# Altium PCB PCB3.PcbDoc
Units mil, origin at the board's own origin, x right, y up, seen from the top; angles counter-clockwise.
Board outline 3937.01 x 3937.01 mil, 2 copper layers (Top Layer, Bottom Layer); 71 components, 48 nets, 176 pads, 328 vias.
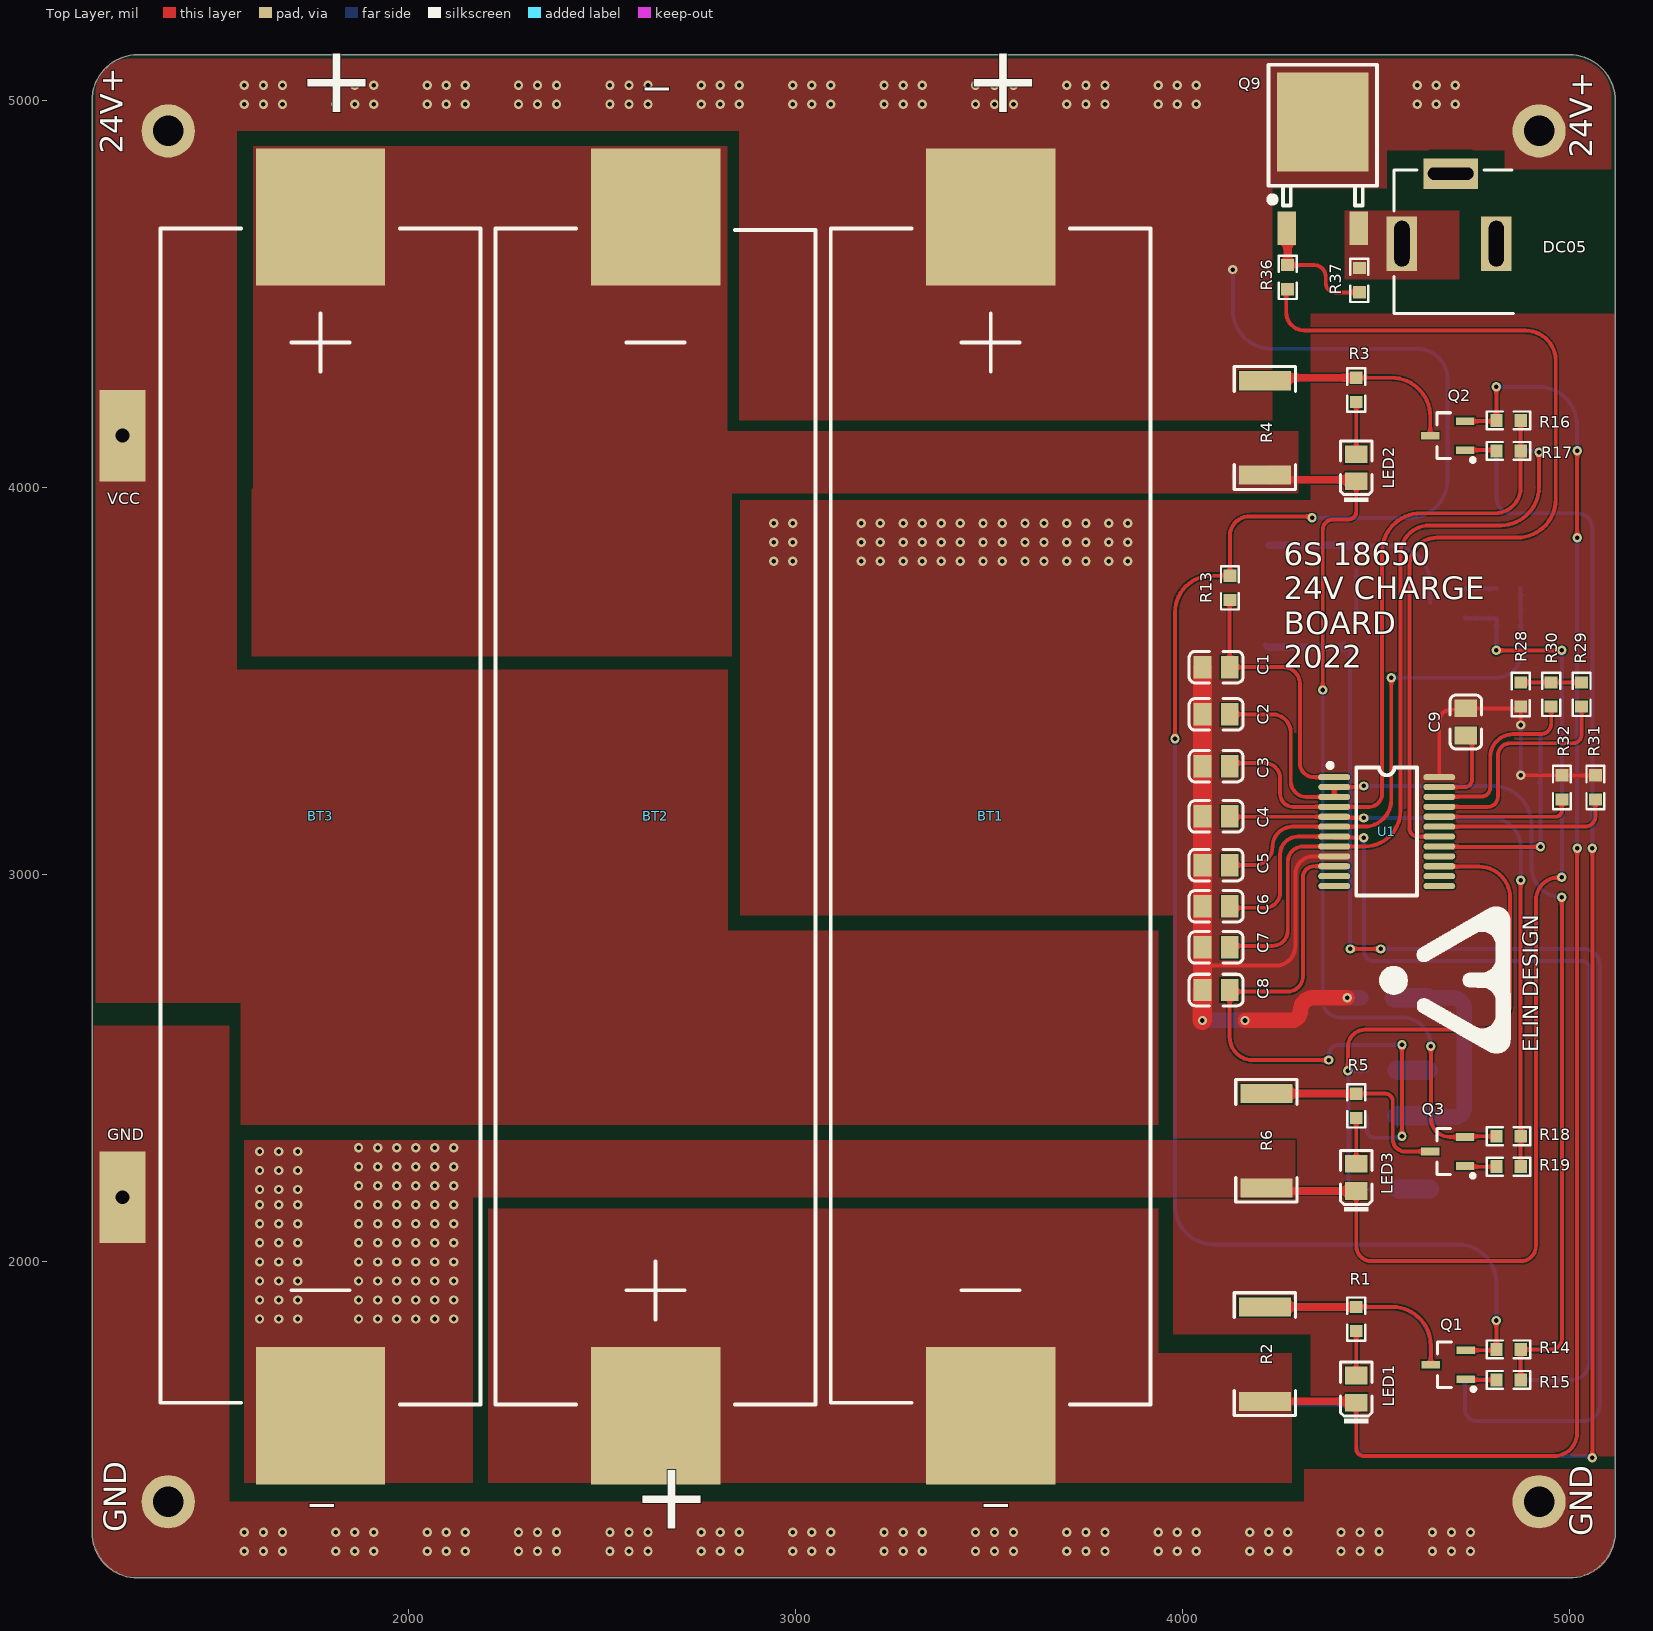
[diagram p0: Top Layer view]
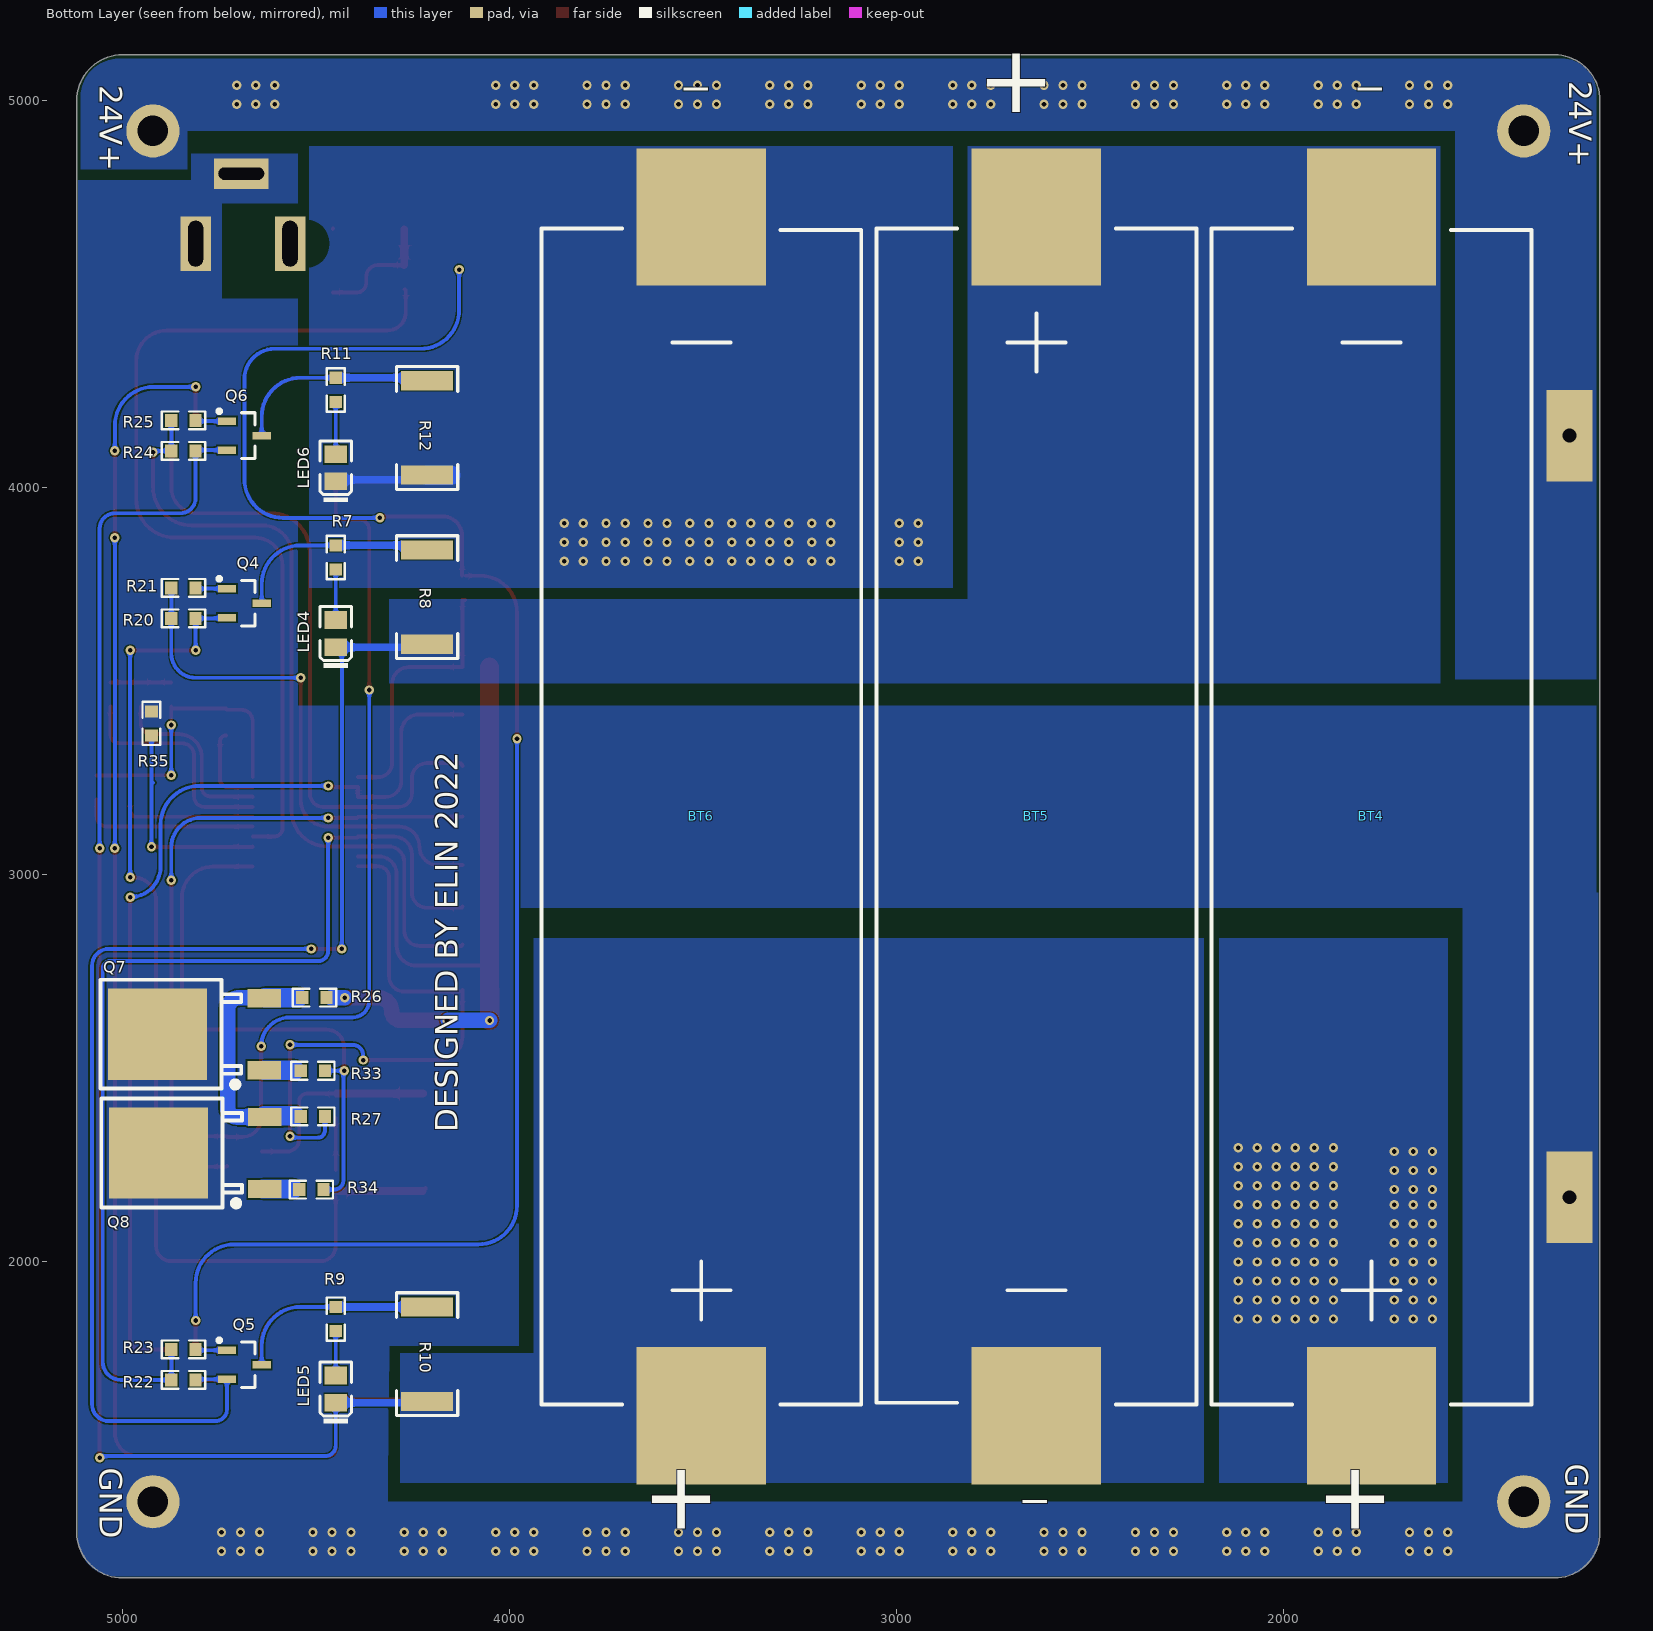
[diagram p1: Bottom Layer view, seen from below]
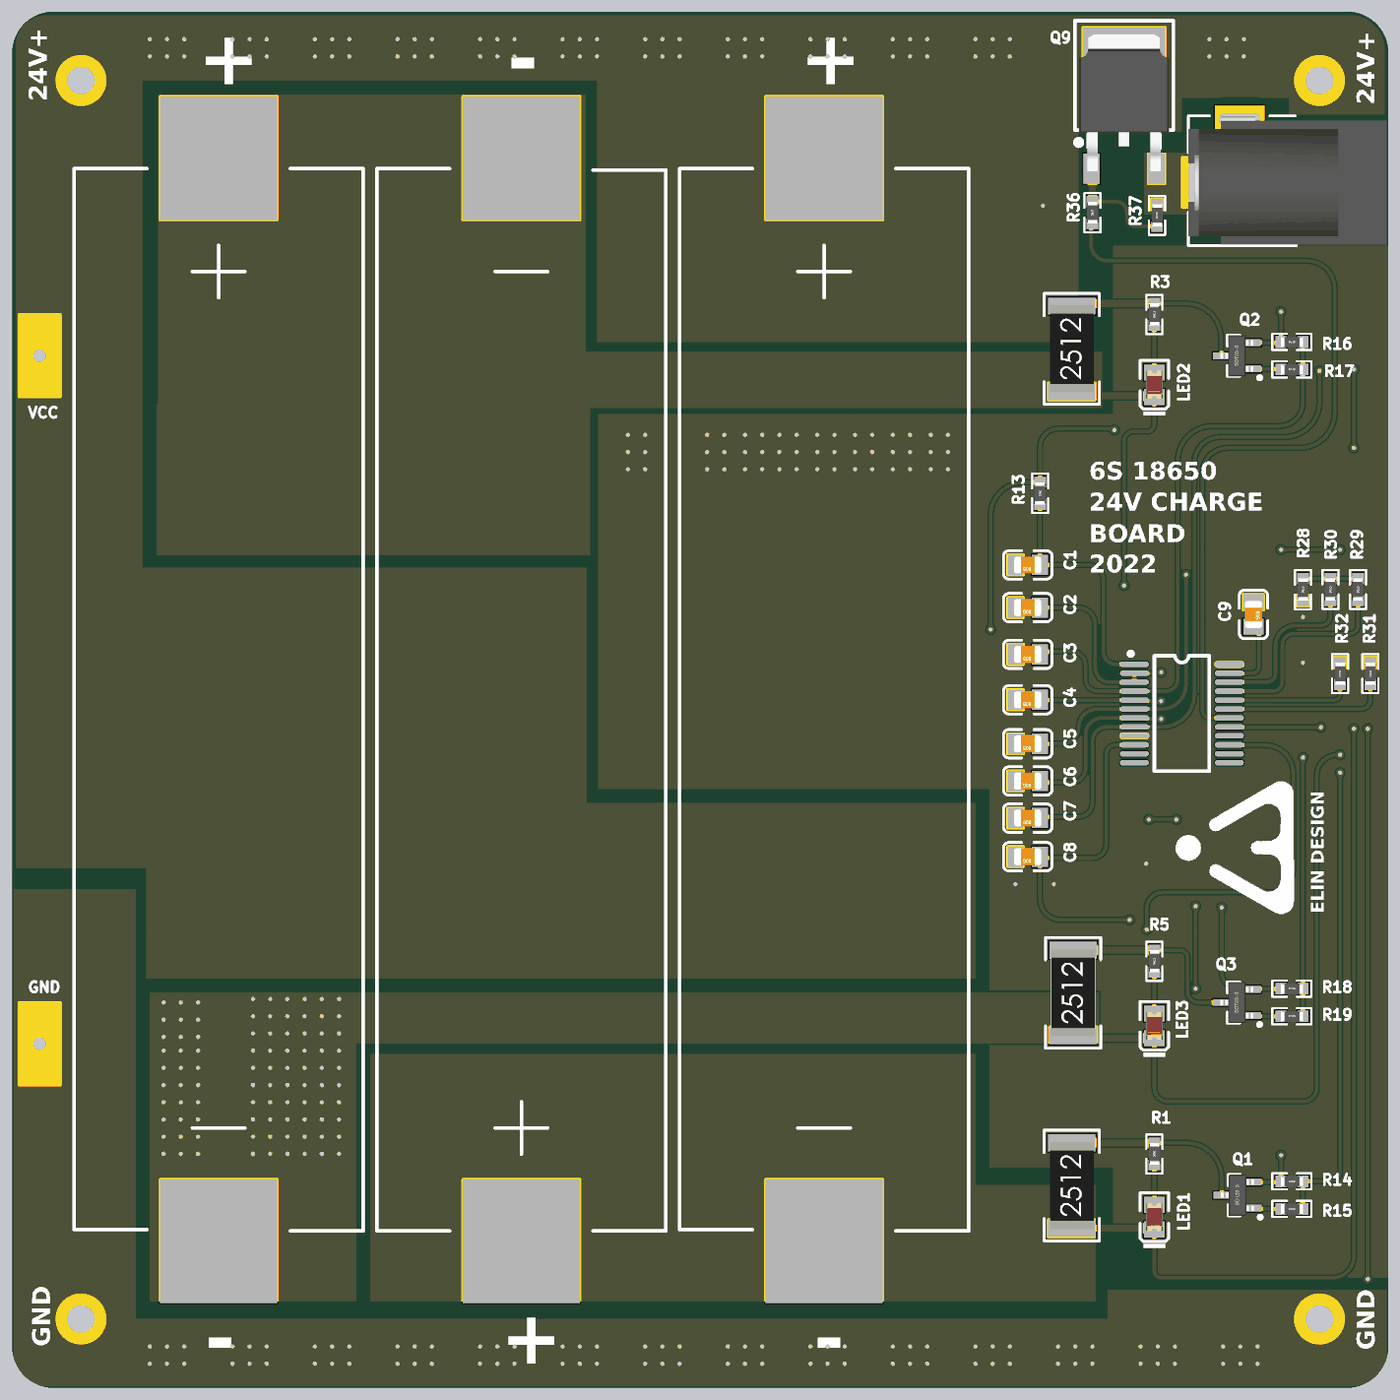
[diagram p2: 3D render of the assembled board from above, using the file's embedded part models]
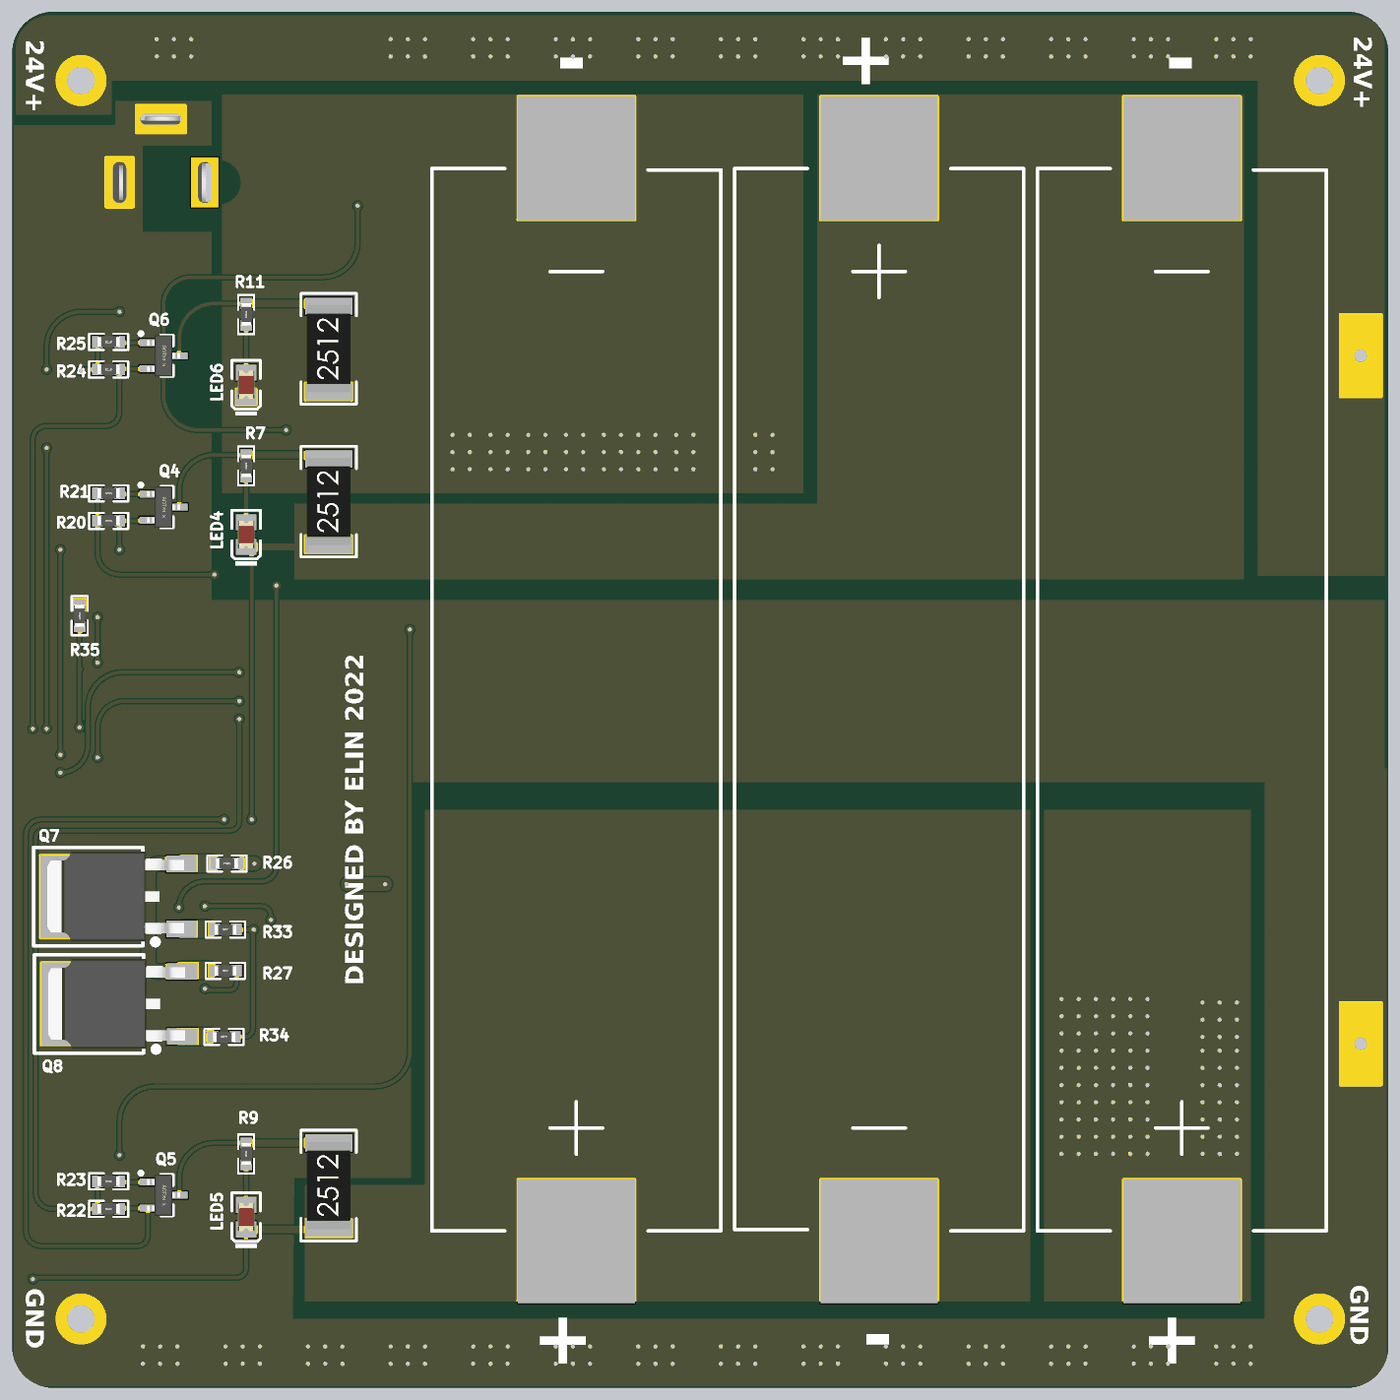
[diagram p3: 3D render of the assembled board from below, using the file's embedded part models]

## Layer stack, top to bottom
Top Solder: solder mask 0.4, Solder Resist, Dk 3.5
Top Layer: signal copper 1.4
Dielectric 1: dielectric 12.6, FR-4, Dk 4.8
Bottom Layer: signal copper 1.4
Bottom Solder: solder mask 0.4, Solder Resist, Dk 3.5

## Board outline
1181.1,1299.21 1181.1,5000 cw(c1299.21,5000) 1299.21,5118.11 5000,5118.11 cw(c5000,5000) 5118.11,5000 5118.11,1299.21 cw(c5000,1299.21) 5000,1181.1 1299.21,1181.1 cw(c1299.21,1299.21)

## Design rules (kind name [scope] priority, off if disabled: settings)
Clearance [All] p1: gap=4 ignorepadtopadclearanceinfootprint=FALSE
HoleSize [All] p1: absolutevalues=TRUE maxlimit=400 minlimit=1 maxpercent=80.000 minpercent=20.000
HoleToHoleClearance [All] p1: gap=3 allowstackedmicrovias=TRUE
MinimumSolderMaskSliver [All] p1: minsoldermaskwidth=3
PlaneConnect [All] p1: planeconnectstyle=Direct reliefexpansion=20 reliefentries=4 reliefconductorwidth=10 reliefairgap=10
PolygonConnect [All] p1: connectstyle=Direct reliefconductorwidth=10 reliefentries=4 polygonreliefangle="90 Angle" airgapwidth=10
RoutingVias [All] p1: holewidth=12 width=24 viastyle="Through Hole" minholewidth=10 minwidth=20 maxholewidth=28 maxwidth=50
SilkToSilkClearance [All] p1: silktosilkclearance=3
SilkToSolderMaskClearance [IsPad] p1: minsilkscreentomaskgap=3 clearancetoexposedcopper=TRUE
SolderMaskExpansion [All] p1: expansion=4
Width [All] p1: maxlimit=196.85 minlimit=10 preferedwidth=10
24 further rules are at their usual default settings.

## Components (designator, comment, footprint, x,y, rotation, side; value= is the part's Value field where it differs from the comment)
BT1 "18650" 18650-贴片 3503.94,3149.61 r270 top locked
BT2 "18650" 18650-贴片 2637.8,3149.61 r90 top locked
BT3 "18650" 18650-贴片 1771.65,3149.61 r270 top locked
BT4 "18650" 18650-贴片 1771.65,3149.61 r90 bottom locked
BT5 "18650" 18650-贴片 2637.8,3149.61 r270 bottom locked
BT6 "18650" 18650-贴片 3503.94,3149.61 r90 bottom locked
C1 "" 0805_C 4086.61,3535.43 r180 top value=100nF
C2 "" 0805_C 4086.61,3413.39 r180 top value=100nF
C3 "" 0805_C 4086.61,3279.53 r180 top value=100nF
C4 "" 0805_C 4086.61,3149.61 r180 top value=100nF
C5 "" 0805_C 4086.61,3023.62 r180 top value=100nF
C6 "" 0805_C 4086.61,2917.32 r180 top value=100nF
C7 "" 0805_C 4086.61,2811.02 r180 top value=100nF
C8 "" 0805_C 4086.61,2700.79 r180 top value=100nF
C9 "" 0805_C 4732.28,3393.7 r270 top value=100nF
DC05 "DC05" "DC-005 - duplicate" 5106.3,4629.92 r180 top
GND "pad" PAD3*3#1 1259.84,2480.32 r90 top (schematic designator pad2)
LED1 "G" LED_0805 4448.82,1669.29 r270 top
LED2 "G" LED_0805 4448.82,4050.79 r270 top
LED3 "G" LED_0805 4448.82,2216.54 r270 top
LED4 "G" LED_0805 4448.82,3622.05 r270 bottom
LED5 "G" LED_0805 4448.82,1669.29 r270 bottom
LED6 "G" LED_0805 4448.82,4050.79 r270 bottom
Q1 "8550" SOT23 4686.73,1732.28 r180 top
Q2 "8550" SOT23 4685.04,4133.86 r180 top
Q3 "8550" SOT23 4685.04,2283.46 r180 top
Q4 "8550" SOT23 4685.04,3700.79 r180 bottom
Q5 "8550" SOT23 4685.04,1732.28 r180 bottom
Q6 "8550" SOT23 4685.04,4133.86 r180 bottom
Q7 "NCE3080K" LC-TO-252-2 4633.86,2586.61 r180 bottom
Q8 "NCE3080K" LC-TO-252-2 4631.73,2279.53 r180 bottom
Q9 "AOD403" LC-TO-252-2 4362.21,4669.29 r270 top
R1 "" 0603-R 4448.82,1850.39 r90 top value=1K
R2 "" LC-2512_R 4212.6,1759.84 r90 top value=50
R3 "" 0603-R 4448.82,4251.97 r90 top value=1K
R4 "" LC-2512_R 4212.6,4153.54 r90 top value=50
R5 "" 0603-R 4448.82,2401.57 r90 top value=1K
R6 "" LC-2512_R 4216.54,2311.02 r90 top value=50
R7 "" 0603-R 4448.82,3818.9 r90 bottom value=1K
R8 "" LC-2512_R 4212.6,3716.54 r90 bottom value=50
R9 "" 0603-R 4448.82,1850.39 r90 bottom value=1K
R10 "" LC-2512_R 4212.6,1759.84 r90 bottom value=50
R11 "" 0603-R 4448.82,4251.97 r90 bottom value=1K
R12 "" LC-2512_R 4212.6,4153.54 r90 bottom value=50
R13 "" 0603-R 4122.05,3740.16 r270 top value=1K
R14 "" 0603-R 4842.52,1771.65 r0 top value=1K
R15 "" 0603-R 4842.52,1692.91 r0 top value=1K
R16 "" 0603-R 4842.52,4173.23 r0 top value=1K
R17 "" 0603-R 4842.52,4094.49 r0 top value=1K
R18 "" 0603-R 4842.52,2322.83 r0 top value=1K
R19 "" 0603-R 4842.52,2244.09 r0 top value=1K
R20 "" 0603-R 4842.52,3661.42 r0 bottom value=1K
R21 "" 0603-R 4842.52,3740.16 r0 bottom value=1K
R22 "" 0603-R 4842.52,1692.91 r0 bottom value=1K
R23 "" 0603-R 4842.52,1771.65 r0 bottom value=1K
R24 "" 0603-R 4842.52,4094.49 r0 bottom value=1K
R25 "" 0603-R 4842.52,4173.23 r0 bottom value=1K
R26 "" 0603-R 4503.94,2681.1 r0 bottom value=1K
R27 "" 0603-R 4507.87,2374.02 r180 bottom value=1K
R28 "QN0603X103J3435HB" 0603-R 4874.02,3464.78 r90 top
R29 "" 0603-R 5031.5,3464.78 r270 top value=350K
R30 "" 0603-R 4952.76,3464.78 r270 top value=35K
R31 "" 0603-R 5066.93,3224.41 r90 top value=1K
R32 "" 0603-R 4980.31,3224.41 r90 top value=1K
R33 "" 0603-R 4507.87,2492.13 r180 bottom value=1K
R34 "" 0603-R 4511.81,2185.04 r180 bottom value=1K
R35 "" 0603-R 4925.2,3389.76 r270 bottom value=200K
R36 "" 0603-R 4271.65,4543.31 r90 top value=2M
R37 "" 0603-R 4456.69,4535.43 r90 top value=2M
U1 "CW1073AAAS" LC-SSOP-24_208mil 4527.56,3110.24 r270 top
VCC "pad" PAD3*3#2 1259.84,4133.86 r0 top (schematic designator pad1)

## Footprints (in the part's own frame and the unit in brackets; to place one, negate y for a bottom-side part, rotate by r counter-clockwise, add the part's x,y. Pads: shape width x height; smd on the part's side, far side on the other; paste and mask are expansions set on the pad)
0603-R [mm]
  rect 0.8x0.85 smd: 1(-0.795,0) 2(0.795,0)
  silkscreen extent -1.43,-0.58 1.42,0.58, body extent -0.8,-0.41 0.8,0.39, height 0.4
0805_C [mm]
  rect 1.16x1.47 smd: 1(-0.89,0) 2(0.89,0)
  silkscreen extent -1.77,-1.04 1.77,1.04, body extent -1,-0.63 1,0.63, height 0.77
18650-贴片 [mm]
  rect 9x8.5 smd: 1(-39.35,0) 2(39.35,0)
  silkscreen extent -38.6,-10.5 38.6,10.5
"DC-005 - duplicate" [mm] "DC Power Jack,  5.5*2.1mm, PCB Mount"
  rect 2x3.6 hole 3 slot 1 at 0 deg: 1(13.7,0) 2(7.5,0)
  rect 3.6x2 hole 3 slot 0.8 at 90 deg: 3(10.5,-4.6)
  silkscreen extent 6.38,-4.83 14.22,4.6, body extent -0.18,-4.78 14.22,4.52, height 11
LC-2512_R [mm]
  rect 1.25x3.42 smd: 1(-3.1,0) 2(3.1,0)
  silkscreen extent -4.03,-2.01 4.02,2.01, body extent -3.16,-1.6 3.16,1.6, height 0.62
LC-SSOP-24_208mil [mm]
  oval 0.4x2.1 smd mask+0.051: 1(-3.575,-3.45) 2(-2.925,-3.45) 3(-2.275,-3.45) 4(-1.625,-3.45) 5(-0.975,-3.45) 6(-0.325,-3.45) 7(0.325,-3.45) 8(0.975,-3.45) 9(1.625,-3.45) 10(2.275,-3.45) 11(2.925,-3.45) 12(3.575,-3.45) 13(3.575,3.45) 14(2.925,3.45) 15(2.275,3.45) 16(1.625,3.45) 17(0.975,3.45) 18(0.325,3.45) 19(-0.325,3.45) 20(-0.975,3.45) 21(-1.625,3.45) 22(-2.275,3.45) 23(-2.925,3.45) 24(-3.575,3.45)
  silkscreen extent -4.5,-3.86 4.2,2
LC-TO-252-2 [mm]
  rect 2.2x1.2 smd: 1(0,-2.361) 3(-0.004,2.361)
  rect 6.5x6 smd: 2(-7,0)
  silkscreen extent -10.75,-3.57 -1.5,3.57, body extent -9.74,-3.27 0.2,3.27, height 2.44
LED_0805 [mm] "贴片二极管"
  rect 1.16x1.47 smd: 1(-0.89,0) 2(0.89,0)
  silkscreen extent -1.77,-1.03 2.24,1.04, body extent -1.01,-0.62 1.01,0.62, height 1.1
PAD3*3#1 [mm] "3MM*3MM"
  rect 6x3 hole 0.9: 1(-8,0)
PAD3*3#2 [mm] "3MM*3MM"
  rect 3x6 hole 0.9: 1(0,0)
SOT23 [mm] "SOT23, 3-Leads, Body 2.9x1.3mm, Pitch 0.95mm, Lead Span 2.3mm, IPC Medium Density"
  rect 1.2x0.5 smd: 1(-1.143,0.95) 2(-1.143,-0.95) 3(1.143,0)
  silkscreen extent -1.78,-1.5 0.7,1.72, body extent -1.2,-1.5 1.2,1.5, height 1.05

## Part data
BT1 BT2 BT3 BT4 BT5 BT6: library part Battery, "Multicell Battery", LatestRevisionDate=17-Jul-2002, LatestRevisionNote="Re-released for DXP Platform.", PackageDescription="Battery; 2 Leads", PackageReference=BAT-2, Published=24-Mar-1999, Publisher="Altium Limited"
C1 C2 C3 C4 C5 C6 C7 C8 C9: library part Cap, "Capacitor", LatestRevisionDate=17-Jul-2002, LatestRevisionNote="Re-released for DXP Platform.", PackageDescription="Radial Cap, Thru-Hole; 2 Leads; 0.3 in Pin Spacing", PackageReference=RAD-0.3, Published=8-Jun-2000, Publisher="Altium Limited"
DC05: "DC05电源"
GND VCC: library part pad1
LED1 LED2 LED3 LED4 LED5 LED6: BOM_Manufacturer="Everlight Elec", BOM_Manufacturer Part=19-21CUTD/S3484/TR8, BOM_Supplier=LCSC, BOM_Supplier Part=C264445, Contributor=LCSC, spicePre=L, spiceSymbolName=19-21CUTD/S3484/TR8
Q1 Q2 Q3 Q4 Q5 Q6: BOM_Manufacturer="Foshan Blue Rocket Elec", BOM_Manufacturer Part=S8550M-D, BOM_Supplier=LCSC, BOM_Supplier Part=C305484, Contributor=LCSC, spicePre=Q, spiceSymbolName=S8550M-D
Q7 Q8: BOM_JLCPCB SMD=Yes, BOM_Manufacturer=Ncepower, BOM_Manufacturer Part=NCE3080K, BOM_Supplier=LCSC, BOM_Supplier Part=C108901, SMT Type=Extend, spicePre=Q, spiceSymbolName=NCE3080K
Q9: BOM_JLCPCB SMD=Yes, BOM_Manufacturer=AOS, BOM_Manufacturer Part=AOD403, BOM_Supplier=LCSC, BOM_Supplier Part=C28969, image=//image.lceda.cn/szlcsc/C28969.jpg, SMT Type=Extend, spicePre=Q, spiceSymbolName=AOD403
R1 R2 R3 R4 R5 R6 R7 R8 R9 R10 R11 R12 R13 R14 R15 R16 R17 R18 R19 R20 R21 R22 R23 R24 R25 R26 R27 R29 R30 R31 R32 R33 R34 R35 R36 R37: library part Res2, "Resistor", LatestRevisionDate=17-Jul-2002, LatestRevisionNote="Re-released for DXP Platform.", PackageDescription="Axial Device, Thru-Hole; 2 Leads; 0.4 in Pin Spacing", PackageReference=AXIAL-0.4, Published=8-Jun-2000, Publisher="Altium Limited"
R28: BOM_Manufacturer=QAMcn, BOM_Manufacturer Part=QN0603X103J3435HB, BOM_Supplier=LCSC, BOM_Supplier Part=C700828, Contributor=LCSC, spicePre=R, spiceSymbolName=QN0603X103J3435HB
U1: library part Component_1

## Free pads (board coordinates)
  round 137.8 hole 78.74: 3(1377.95,1377.95) 3(1377.95,4921.26) 3(4921.26,1377.95) 3(4921.26,4921.26)

## Via types
v1: diameter 24, hole 12, Top Layer to Bottom Layer, tented both sides, 328 vias

## Nets (pads, with @x,y where several pads share a name; then routed paths per layer and width w, separated by ;. In a path a pad name is that pad's centre, name@x,y a point inside that pad or via, vN(x,y) a via of type N, cw(c..) or ccw(c..) an arc to the next point about the centre after c; other vN are vias at no path point)
CH+: DC05.1 Q9.3 R37.2 | length 2.4
  Top Layer w10: Q9.3 cw(c4455.17,4667.93) Q9.3@4456.69,4667.93
GND: DC05.2 DC05.3 GND.1 pad.3@1377.95,1377.95 pad.3@4921.26,1377.95 Q7.2 Q8.2 R35.1
  other v1: 1574.8,1250 1624.02,1250 1673.23,1250 1811.02,1250 1860.24,1250 1909.45,1250 2047.24,1250 2096.46,1250 2145.67,1250 2283.46,1250 2332.68,1250 2381.89,1250 2519.68,1250 2568.9,1250 2618.11,1250 2755.91,1250 2805.12,1250 2854.33,1250 2992.13,1250 3041.34,1250 3090.55,1250 3228.35,1250 3277.56,1250 3326.77,1250 3464.57,1250 3513.78,1250 3562.99,1250 3700.79,1250 3750,1250 3799.21,1250 3937.01,1250 3986.22,1250 4035.43,1250 4173.23,1250 4222.44,1250 4271.65,1250 4409.45,1250 4458.66,1250 4507.87,1250 4645.67,1250 4694.88,1250 4744.09,1250 1574.8,1299.21 1624.02,1299.21 1673.23,1299.21 1811.02,1299.21 1860.24,1299.21 1909.45,1299.21 2047.24,1299.21 2096.46,1299.21 2145.67,1299.21 2283.46,1299.21 2332.68,1299.21 2381.89,1299.21 2519.68,1299.21 2568.9,1299.21 2618.11,1299.21 2755.91,1299.21 2805.12,1299.21 2854.33,1299.21 2992.13,1299.21 3041.34,1299.21 3090.55,1299.21 3228.35,1299.21 3277.56,1299.21 3326.77,1299.21 3464.57,1299.21 3513.78,1299.21 3562.99,1299.21 3700.79,1299.21 3750,1299.21 3799.21,1299.21 3937.01,1299.21 3986.22,1299.21 4035.43,1299.21 4173.23,1299.21 4222.44,1299.21 4271.65,1299.21 4409.45,1299.21 4458.66,1299.21 4507.87,1299.21 4645.67,1299.21 4694.88,1299.21 4744.09,1299.21
NetBT1_2: BT1.2 BT2.1 LED1.2 Q2.2 R2.1 R16.1 | length 3995.9
  Top Layer w10: LED1.2@4448.82,1618.5 4448.82,1515.75 ccw(c4468.5,1515.75) 4468.5,1496.06 4959.35,1496.06 ccw(c4959.35,1556.4) 5019.69,1556.4 v1(5019.69,3066.93) ; Q2.2 4809.26,4171.26 ccw(c4809.26,4173.23) R16.1 4811.02,4173.23 v1(4811.02,4259.84) ; v1(5019.69,3870.08) v1(5019.69,4094.49)
  Top Layer w20: R2.1 4445.28,1637.8 cw(c4445.28,1634.25) LED1.2
  Bottom Layer w10: v1(4811.02,4259.84) 4919.69,4259.84 cw(c4919.69,4159.84) 5019.69,4159.84 v1(5019.69,4094.49) ; v1(5019.69,3066.93) v1(5019.69,3870.08)
NetBT2_2: BT2.2 BT3.1 LED2.2 Q3.2 R4.1 R18.1 | length 2390.9
  Top Layer w10: R4.1 ccw(c4228.35,4031.5) R4.1@4228.35,4015.75 ; v1(4362.2,3476.38) 4362.2,3889.76 cw(c4389.76,3889.76) 4389.76,3917.32 4429.13,3917.32 ccw(c4429.13,3937.01) 4448.82,3937.01 LED2.2 cw(c4452.76,4015.75) LED2.2@4452.76,4019.68 ; v1(4641.73,2555.12) 4641.73,2370.08 ccw(c4690.94,2370.08) 4690.94,2320.87 Q3.2 cw(c4732.01,2320.87) 4732.01,2322.83 R18.1
  Top Layer w20: R4.1@4232.28,4019.68 LED2.2@4452.76,4019.68
  Bottom Layer w10: v1(4362.2,3476.38) 4362.2,2673.23 ccw(c4405.51,2673.23) 4405.51,2629.92 4566.93,2629.92 cw(c4566.93,2555.12) v1(4641.73,2555.12)
NetBT3_2: BT3.2 BT4.1 LED3.2 Q4.2 R6.1 R20.1 | length 2787.3
  Top Layer w10: R6.1 ccw(c4224.02,2188.98) R6.1@4224.02,2181.5 ; LED3.2@4448.82,2165.35 4448.82,2039.37 ccw(c4488.19,2039.37) 4488.19,2000 4874.02,2000 ccw(c4874.02,2039.37) 4913.39,2039.37 4913.39,2933.07 cw(c4972.44,2933.07) 4972.44,2992.13 v1(4980.31,2992.13) ; v1(4811.02,3578.74) v1(4980.31,3578.74)
  Top Layer w20: R6.1@4224.02,2181.5 LED3.2
  Bottom Layer w10: Q4.2 ccw(c4732.01,3663.39) 4732.01,3661.42 R20.1@4811.02,3661.42 ; v1(4811.02,3578.74) R20.1@4811.02,3661.42 ; R20.1 R20.1@4811.02,3661.42 ; v1(4980.31,2992.13) v1(4980.31,3578.74)
  other v1: 1614.17,1850.39 1663.39,1850.39 1712.6,1850.39 1870.08,1850.39 1919.29,1850.39 1968.5,1850.39 2017.72,1850.39 2066.93,1850.39 2116.14,1850.39 1614.17,1899.61 1663.39,1899.61 1712.6,1899.61 1870.08,1899.61 1919.29,1899.61 1968.5,1899.61 2017.72,1899.61 2066.93,1899.61 2116.14,1899.61 1614.17,1948.82 1663.39,1948.82 1712.6,1948.82 1870.08,1948.82 1919.29,1948.82 1968.5,1948.82 2017.72,1948.82 2066.93,1948.82 2116.14,1948.82 1614.17,1998.03 1663.39,1998.03 1712.6,1998.03 1870.08,1998.03 1919.29,1998.03 1968.5,1998.03 2017.72,1998.03 2066.93,1998.03 2116.14,1998.03 1614.17,2047.24 1663.39,2047.24 1712.6,2047.24 1870.08,2047.24 1919.29,2047.24 1968.5,2047.24 2017.72,2047.24 2066.93,2047.24 2116.14,2047.24 1614.17,2096.46 1663.39,2096.46 1712.6,2096.46 1870.08,2096.46 1919.29,2096.46 1968.5,2096.46 2017.72,2096.46 2066.93,2096.46 2116.14,2096.46 1614.17,2145.67 1663.39,2145.67 1712.6,2145.67 1870.08,2145.67 1919.29,2145.67 1968.5,2145.67 2017.72,2145.67 2066.93,2145.67 2116.14,2145.67 1614.17,2185.04 1663.39,2185.04 1712.6,2185.04 1870.08,2194.88 1919.29,2194.88 1968.5,2194.88 2017.72,2194.88 2066.93,2194.88 2116.14,2194.88 1614.17,2234.25 1663.39,2234.25 1712.6,2234.25 1870.08,2244.09 1919.29,2244.09 1968.5,2244.09 2017.72,2244.09 2066.93,2244.09 2116.14,2244.09 1614.17,2283.46 1663.39,2283.46 1712.6,2283.46 1870.08,2293.31 1919.29,2293.31 1968.5,2293.31 2017.72,2293.31 2066.93,2293.31 2116.14,2293.31
NetBT4_2: BT4.2 BT5.1 LED4.2 Q5.2 R8.1 R22.1 | length 3383.2
  Top Layer w10: v1@4440.94,2807.09 v1(4511.81,2807.09)
  Bottom Layer w10: R8.1 ccw(c4220.08,3594.49) R8.1@4220.08,3587.01 ; v1(4433.07,2807.09) 4433.07,3571.26 cw(c4448.82,3571.26) LED4.2 ; v1@4507.87,2803.15 cw(c4511.81,2803.15) v1(4511.81,2807.09) 5035.43,2807.09 cw(c5035.43,2763.78) 5078.74,2763.78 5078.74,1629.92 cw(c5035.43,1629.92) 5035.43,1586.61 4759.84,1586.61 cw(c4759.84,1616.42) 4730.04,1616.42 Q5.2 4809.26,1694.88 cw(c4809.26,1692.91) R22.1
  Bottom Layer w20: R8.1@4220.08,3587.01 LED4.2
NetBT5_2: BT5.2 BT6.1 LED5.2 Q6.2 R10.1 R24.1 | length 3859.5
  Top Layer w10: v1(5059.06,1492.13) v1(5059.06,3066.93)
  Bottom Layer w10: R10.1 ccw(c4216.14,1637.8) R10.1@4216.14,1634.25 ; LED5.2@4448.82,1618.5 4448.82,1523.62 ccw(c4476.38,1523.62) 4476.38,1496.06 5055.12,1496.06 v1(5059.06,1492.13) ; Q6.2 4809.26,4096.46 cw(c4809.26,4094.49) R24.1 4811.23,3972.23 ccw(c4850.39,3972.23) 4850.39,3933.07 5019.69,3933.07 cw(c5019.69,3893.7) 5059.06,3893.7 v1(5059.06,3066.93)
  Bottom Layer w20: R10.1@4216.14,1634.25 LED5.2
NetBT6_2: BT6.2 C1.2 C2.2 C3.2 C4.2 C5.2 C6.2 C7.2 C8.2 C9.1 LED6.2 R12.1 R26.1 R28.1 R31.2 R32.2 U1.9 U1.24 | length 2960.3
  Top Layer w10: C8.2@4051.18,2700.79 C8.2 ; 4051.57,2755.91 cw(c4059.45,2755.91) 4059.45,2763.78 4240.16,2763.78 ccw(c4240.16,2814.96) 4291.34,2814.96 4291.34,3000 cw(c4337.6,3000) 4337.6,3046.26 U1.9 ; U1.24 4663.39,3395.67 cw(c4692.91,3395.67) 4692.91,3425.2 4728.74,3425.2 ccw(c4728.74,3428.74) C9.1 R28.1@4869.27,3428.74 ; v1(4874.02,3255.91) 4980.31,3255.91 R32.2 R31.2 ; v1(4874.02,3385.83) R28.1
  Top Layer w40: v1(4161.42,2622.05) 4279.53,2622.05 ccw(c4279.53,2646.85) 4304.33,2646.85 cw(c4338.58,2646.85) 4338.58,2681.1 v1(4425.2,2681.1)
  Top Layer w50: v1(4051.18,2622.05) C8.2@4051.18,2700.79 ; C8.2 4051.57,2755.91 C7.2 C6.2 C5.2 C4.2 C3.2 C2.2 C1.2
  Bottom Layer w10: v1(4874.02,3255.91) v1(4874.02,3385.83)
  Bottom Layer w20: R12.1@4232.28,4019.68 LED6.2@4452.76,4019.68
  Bottom Layer w40: v1(4051.18,2622.05) v1@4157.48,2622.05 ; v1(4425.2,2681.1) R26.1@4460.63,2681.1
  Bottom Layer w50: R12.1@4151.18,4031.5 R12.1
  other v1: 2942.91,3809.06 2992.13,3809.06 3169.29,3809.06 3218.5,3809.06 3277.56,3809.06 3326.77,3809.06 3375.98,3809.06 3425.2,3809.06 3484.25,3809.06 3533.46,3809.06 3592.52,3809.06 3641.73,3809.06 3700.79,3809.06 3750,3809.06 3809.06,3809.06 3858.27,3809.06 2942.91,3858.27 2992.13,3858.27 3169.29,3858.27 3218.5,3858.27 3277.56,3858.27 3326.77,3858.27 3375.98,3858.27 3425.2,3858.27 3484.25,3858.27 3533.46,3858.27 3592.52,3858.27 3641.73,3858.27 3700.79,3858.27 3750,3858.27 3809.06,3858.27 3858.27,3858.27 2942.91,3907.48 2992.13,3907.48 3169.29,3907.48 3218.5,3907.48 3277.56,3907.48 3326.77,3907.48 3375.98,3907.48 3425.2,3907.48 3484.25,3907.48 3533.46,3907.48 3592.52,3907.48 3641.73,3907.48 3700.79,3907.48 3750,3907.48 3809.06,3907.48 3858.27,3907.48
NetC1_1: C1.1 R13.2 U1.1 | length 701.2
  Top Layer w10: R13.2@4114.17,3708.87 4121.65,3708.87 C1.1 4259.84,3535.43 cw(c4259.84,3492.13) 4303.15,3492.13 4303.15,3287.4 ccw(c4339.57,3287.4) 4339.57,3250.98 U1.1
NetC2_1: C2.1 R14.2 R15.2 U1.2 U1.3 | length 2615.3
  Top Layer w10: C2.1 4232.28,3413.39 cw(c4232.28,3366.14) 4279.53,3366.14 4279.53,3240.16 ccw(c4319.88,3240.16) 4319.88,3199.8 U1.3 U1.2 4465.55,3225.39 ccw(c4465.55,3228.35) v1(4468.5,3228.35) ; R15.2 R14.2 4952.76,1771.65 ccw(c4952.76,1799.21) 4980.32,1799.21 v1(4980.31,2940.94)
  Bottom Layer w10: v1(4468.5,3228.35) 4801.57,3228.35 cw(c4801.57,3128.35) 4901.57,3128.35 4901.57,3019.69 ccw(c4980.31,3019.69) v1(4980.31,2940.94)
NetC3_1: C3.1 R16.2 R17.2 U1.4 | length 1750.8
  Top Layer w10: C3.1 cw(c4129.53,3279.53) 4129.53,3287.4 4212.6,3287.4 cw(c4212.6,3248.03) 4251.97,3248.03 4251.97,3208.66 ccw(c4286.42,3208.66) 4286.42,3174.21 U1.4 4481.3,3174.21 ccw(c4481.3,3208.66) 4515.75,3208.66 4515.75,3833.07 cw(c4615.75,3833.07) 4615.75,3933.07 4807.09,3933.07 ccw(c4807.09,3999.79) 4873.81,3999.79 R17.2 R16.2
NetC4_1: C4.1 R18.2 R19.2 U1.5 | length 1623.5
  Top Layer w10: C4.1 ccw(c4122.64,3149.61) 4122.64,3148.62 U1.5 ccw(c4394.69,3148.62) 4394.69,3145.67 v1(4468.5,3145.67) ; R19.2 R18.2 4873.81,2984.04 v1(4874.02,2984.25)
  Bottom Layer w10: v1(4468.5,3145.67) 4797.57,3145.67 cw(c4797.57,3069.22) 4874.02,3069.22 v1(4874.02,2984.25)
NetC5_1: C5.1 R20.2 R21.2 U1.6 | length 1371.8
  Top Layer w10: C5.1 4185.04,3023.62 ccw(c4185.04,3070.87) 4232.28,3070.87 cw(c4284.45,3070.87) 4284.45,3123.03 U1.6 4469.49,3123.03 ccw(c4469.49,3192.91) 4539.37,3192.91 v1(4539.37,3507.87) v1@4539.37,3510.24
  Bottom Layer w10: v1(4539.37,3507.87) 4811.02,3507.87 ccw(c4811.02,3570.87) 4874.02,3570.87 4874.02,3661.42 R20.2 R21.2
NetC6_1: C6.1 R22.2 R23.2 U1.7 | length 2698.8
  Top Layer w10: C6.1 ccw(c4125.59,2917.32) 4125.59,2913.39 4212.6,2913.39 ccw(c4212.6,2952.76) 4251.97,2952.76 4251.97,3051.18 cw(c4298.23,3051.18) 4298.23,3097.44 U1.7 ccw(c4394.69,3097.44) 4394.69,3094.49 v1(4468.5,3094.49)
  Bottom Layer w10: v1(4468.5,3094.49) 4468.5,2800.98 ccw(c4493.9,2800.98) 4493.9,2775.59 5031.52,2775.59 cw(c5031.52,2755.93) 5051.18,2755.93 5051.18,1740.16 cw(c5003.94,1740.16) 5003.94,1692.91 R22.2 R23.2
NetC7_1: C7.1 R24.2 R25.2 U1.8 | length 2061
  Top Layer w10: C7.1@4121.65,2818.9 ccw(c4125.59,2818.9) 4125.59,2814.96 4232.28,2814.96 ccw(c4232.28,2854.33) 4271.65,2854.33 4271.65,3031.5 cw(c4312.01,3031.5) 4312.01,3071.85 U1.8 4470.87,3071.85 ccw(c4470.87,3163.98) 4562.99,3163.98 4562.99,3826.77 cw(c4637.8,3826.77) 4637.8,3901.57 4821.26,3901.57 ccw(c4821.26,4001.57) 4921.26,4001.57 v1(4921.26,4090.55) v1@4921.26,4094.49
  Bottom Layer w10: R25.2 R24.2 4917.32,4094.49 cw(c4917.32,4090.55) v1(4921.26,4090.55)
NetC8_1: C8.1 R27.2 U1.10 | length 1577.6
  Top Layer w10: v1(4377.95,2519.68) 4181.49,2519.68 cw(c4181.49,2579.52) 4121.65,2579.52 C8.1 ccw(c4125.59,2700.79) 4125.59,2696.85 4271.65,2696.85 ccw(c4271.65,2736.22) 4311.02,2736.22 4311.02,2992.13 cw(c4339.57,2992.13) 4339.57,3020.67 U1.10 ; v1(4566.93,2322.83) v1(4566.93,2559.06)
  Bottom Layer w10: v1(4377.95,2519.68) 4377.95,2532.17 cw(c4404.84,2532.17) 4404.84,2559.06 v1(4566.93,2559.06) ; R27.2@4472.44,2369.87 cw(c4476.59,2369.87) R27.2 4476.59,2338.37 ccw(c4496.06,2338.37) 4496.06,2318.9 4562.99,2318.9 ccw(c4562.99,2322.83) v1(4566.93,2322.83)
NetC9_2: C9.2 U1.23 | length 218.9
  Top Layer w10: U1.23 4729.33,3225.39 ccw(c4729.33,3244.09) 4748.03,3244.09 4748.03,3342.91 ccw(c4732.28,3342.91) C9.2
NetLED1_1: LED1.1 R1.1 | length 130.5
  Top Layer w10: LED1.1@4448.82,1688.58 R1.1
NetLED2_1: LED2.1 R3.1 | length 134.9
  Top Layer w10: LED2.1 R3.1
NetLED3_1: LED3.1 R5.1 | length 134.9
  Top Layer w10: LED3.1@4448.82,2235.43 R5.1
NetLED4_1: LED4.1 R7.1 | length 130.5
  Bottom Layer w10: LED4.1 R7.1
NetLED5_1: LED5.1 R9.1 | length 130.5
  Bottom Layer w10: LED5.1@4448.82,1688.58 R9.1
NetLED6_1: LED6.1 R11.1 | length 134.9
  Bottom Layer w10: LED6.1 R11.1
NetQ1_1: Q1.1 R15.1 | length 80.6
  Top Layer w10: Q1.1 ccw(c4733.7,1694.88) 4733.7,1692.91 R15.1
NetQ1_3: Q1.3 R1.2 R2.2 | length 542.5
  Top Layer w10: R2.2 ccw(c4224.62,1881.89) R2.2@4224.62,1869.87 ; R1.2 4541.73,1881.68 cw(c4541.73,1781.68) 4641.73,1781.68 Q1.3
  Top Layer w20: R2.2@4224.62,1881.68 R1.2
NetQ2_1: Q2.1 R17.1 | length 82.3
  Top Layer w10: Q2.1 4809.26,4096.46 cw(c4809.26,4094.49) R17.1
NetQ2_3: Q2.3 R3.2 R4.2 | length 521.9
  Top Layer w10: R3.2 4540.04,4283.26 cw(c4540.04,4183.26) 4640.04,4183.26 Q2.3
  Top Layer w20: R4.2@4224.62,4283.26 R3.2
NetQ3_1: Q3.1 R19.1 | length 82.3
  Top Layer w10: Q3.1 ccw(c4732.01,2246.06) 4732.01,2244.09 R19.1
NetQ3_3: Q3.3 R5.2 R6.2 | length 542.9
  Top Layer w10: R5.2 4523.83,2432.86 cw(c4523.83,2413.39) 4543.31,2413.39 4543.31,2314.96 ccw(c4574.8,2314.96) 4574.8,2283.46 Q3.3
  Top Layer w20: R6.2@4222.55,2433.07 R5.2@4446.75,2433.07
NetQ4_1: Q4.1 R21.1 | length 82.3
  Bottom Layer w10: Q4.1 4809.26,3738.19 ccw(c4809.26,3740.16) R21.1
NetQ4_3: Q4.3 R7.2 R8.2 | length 521.9
  Bottom Layer w10: R7.2 4540.04,3850.18 cw(c4540.04,3750.18) 4640.04,3750.18 Q4.3
  Bottom Layer w20: R8.2@4224.62,3850.18 R7.2
NetQ5_1: Q5.1 R23.1 | length 82.3
  Bottom Layer w10: Q5.1 4809.26,1769.69 ccw(c4809.26,1771.65) R23.1
NetQ5_3: Q5.3 R9.2 R10.2 | length 521.9
  Bottom Layer w10: R9.2 4540.04,1881.68 cw(c4540.04,1781.68) 4640.04,1781.68 Q5.3
  Bottom Layer w20: R10.2@4224.62,1881.68 R9.2
NetQ6_1: Q6.1 R25.1 | length 82.3
  Bottom Layer w10: Q6.1 4809.26,4171.26 ccw(c4809.26,4173.23) R25.1
NetQ6_3: Q6.3 R11.2 R12.2 | length 521.9
  Bottom Layer w10: R11.2 4540.04,4283.26 cw(c4540.04,4183.26) 4640.04,4183.26 Q6.3
  Bottom Layer w20: R12.2@4228.56,4283.26 R11.2@4452.76,4283.26
NetQ7_1: Q7.1 R33.1 | length 81.1
  Bottom Layer w10: R33.1 cw(c4540.69,2492.13) R33.1@4540.69,2493.65
  Bottom Layer w50: 4555.12,2493.65 Q7.1
NetQ7_3: Q7.3 Q8.3 R26.2 R27.1 | length 642.3
  Bottom Layer w10: Q7.3@4632.5,2681.1 cw(c4632.5,2679.58) Q7.3 cw(c4635.55,2679.58) Q7.3@4635.55,2681.1
  Bottom Layer w40: Q8.3 4703.2,2372.49 ccw(c4703.2,2397.64) 4728.35,2397.64 4728.35,2649.61 ccw(c4696.85,2649.61) 4696.85,2681.1 Q7.3@4635.55,2681.1
  Bottom Layer w50: R26.2@4547.24,2681.1 Q7.3@4632.5,2681.1 ; 4555.12,2375.54 Q8.3@4633.86,2375.54
NetQ8_1: Q8.1 R34.1 | length 78.7
  Bottom Layer w50: 4559.06,2186.56 Q8.1@4637.8,2186.56
NetQ9_1: Q9.1 R36.2 R37.1 | length 328.4
  Top Layer w10: Q9.1 cw(c4269.24,4666.88) Q9.1@4271.65,4666.88 ; R36.2 4339.54,4574.59 cw(c4339.54,4544.06) 4370.08,4544.06 4370.08,4527.56 ccw(c4393.49,4527.56) 4393.49,4504.15 R37.1
  Top Layer w20: R36.2 Q9.1@4271.65,4666.88
NetR28_2: R28.2 R29.1 R30.1 | length 157.5
  Top Layer w10: R28.2 R30.1 R29.1
NetR29_2: R29.2 U1.21 | length 592.3
  Top Layer w10: U1.21 4788.39,3174.21 ccw(c4788.39,3200.79) 4814.96,3200.79 4814.96,3307.09 cw(c4846.46,3307.09) 4846.46,3338.58 5007.87,3338.58 ccw(c5007.87,3362.2) 5031.5,3362.2 R29.2
NetR30_2: R30.2 U1.22 | length 475.3
  Top Layer w10: U1.22 cw(c4664.37,3199.8) 4664.37,3200.79 4771.65,3200.79 ccw(c4771.65,3224.41) 4795.28,3224.41 4795.28,3303.15 cw(c4854.33,3303.15) 4854.33,3362.2 4925.2,3362.2 ccw(c4925.2,3389.76) 4952.76,3389.76 R30.2
NetR31_1: R31.1 U1.19 | length 462.2
  Top Layer w10: U1.19 5040.35,3123.03 ccw(c5040.35,3149.61) 5066.93,3149.61 R31.1
NetR32_1: R32.1 U1.20 | length 354.2
  Top Layer w10: U1.20 4963.58,3148.62 ccw(c4963.58,3165.35) 4980.31,3165.35 R32.1
NetR33_2: R33.2 R34.2 U1.15 | length 1445.2
  Top Layer w10: v1(4427.17,2492.13) 4427.17,2553.15 cw(c4472.44,2553.15) 4472.44,2598.43 4779.81,2598.43 ccw(c4779.81,2665.07) 4846.46,2665.07 4846.46,2939.5 ccw(c4766.27,2939.5) 4766.27,3019.68 4664.37,3019.68 cw(c4664.37,3020.67) U1.15
  Bottom Layer w10: v1@4429.13,2492.13 v1(4427.17,2492.13) cw(c4427.17,2490.16) 4429.13,2490.16 4429.13,2208.66 ccw(c4452.76,2208.66) 4452.76,2185.04 R34.2 ; v1@4433.07,2488.19 cw(c4437.01,2488.19) 4437.01,2492.13 R33.2
NetR35_2: R35.2 U1.17 | length 559.9
  Top Layer w10: U1.17 ccw(c4664.37,3071.85) 4664.37,3070.87 v1(4925.2,3070.87)
  Bottom Layer w10: 4921.26,3236.43 cw(c4921.26,3232.49) 4925.2,3232.49 ; v1(4925.2,3070.87) 4925.2,3232.49 ; R35.2@4925.2,3362.2 R35.2 4925.2,3232.49
NetR36_1: R36.1 U1.18 | length 2432.1
  Top Layer w10: R36.1 ccw(c4271.65,4508.08) 4267.72,4508.08 4267.72,4452.76 ccw(c4314.96,4452.76) 4314.96,4405.51 4885.83,4405.51 cw(c4885.83,4326.77) 4964.57,4326.77 4964.57,3970.08 cw(c4864.57,3970.08) 4864.57,3870.08 4657.48,3870.08 ccw(c4657.48,3799.21) 4586.61,3799.21 4586.61,3118.11 ccw(c4607.28,3118.11) 4607.28,3097.44 U1.18
P+: BT1.1 pad.3@1377.95,4921.26 pad.3@4921.26,4921.26 Q1.2 Q9.2 R13.1 R14.1 VCC.1 | length 4690.9
  Top Layer w10: v1(3980.32,3350.39) 3980.32,3677.17 cw(c4074.59,3677.17) 4074.59,3771.44 R13.1@4114.17,3771.44 ; R13.1 4122.05,3874.02 cw(c4173.23,3874.02) 4173.23,3925.2 v1@4334.65,3925.2 ; Q1.2 4809.26,1769.69 ccw(c4809.26,1771.65) R14.1 4811.02,1771.65 v1(4811.02,1846.46)
  Bottom Layer w10: v1(3980.32,3350.39) 3980.32,2143.31 ccw(c4080.32,2143.31) 4080.32,2043.31 4711.02,2043.31 cw(c4711.02,1943.31) 4811.02,1943.31 v1(4811.02,1846.46) ; v1(4129.92,4562.99) 4129.92,4458.27 ccw(c4229.92,4458.27) 4229.92,4358.27 4606.3,4358.27 cw(c4606.3,4279.53) 4685.04,4279.53 4685.04,4021.26 cw(c4585.04,4021.26) 4585.04,3921.26 v1(4334.65,3921.26)
  other v1: 1574.8,4990.16 1624.02,4990.16 1673.23,4990.16 1811.02,4990.16 1860.24,4990.16 1909.45,4990.16 2047.24,4990.16 2096.46,4990.16 2145.67,4990.16 2283.46,4990.16 2332.68,4990.16 2381.89,4990.16 2519.68,4990.16 2568.9,4990.16 2618.11,4990.16 2755.91,4990.16 2805.12,4990.16 2854.33,4990.16 2992.13,4990.16 3041.34,4990.16 3090.55,4990.16 3228.35,4990.16 3277.56,4990.16 3326.77,4990.16 3464.57,4990.16 3513.78,4990.16 3562.99,4990.16 3700.79,4990.16 3750,4990.16 3799.21,4990.16 3937.01,4990.16 3986.22,4990.16 4035.43,4990.16 4606.3,4990.16 4655.51,4990.16 4704.72,4990.16 1574.8,5039.37 1624.02,5039.37 1673.23,5039.37 1811.02,5039.37 1860.24,5039.37 1909.45,5039.37 2047.24,5039.37 2096.46,5039.37 2145.67,5039.37 2283.46,5039.37 2332.68,5039.37 2381.89,5039.37 2519.68,5039.37 2568.9,5039.37 2618.11,5039.37 2755.91,5039.37 2805.12,5039.37 2854.33,5039.37 2992.13,5039.37 3041.34,5039.37 3090.55,5039.37 3228.35,5039.37 3277.56,5039.37 3326.77,5039.37 3464.57,5039.37 3513.78,5039.37 3562.99,5039.37 3700.79,5039.37 3750,5039.37 3799.21,5039.37 3937.01,5039.37 3986.22,5039.37 4035.43,5039.37 4606.3,5039.37 4655.51,5039.37 4704.72,5039.37
pads on no net: U1.11 U1.12 U1.13 U1.14 U1.16

## Polygon pours and split planes (outlines as drawn)
GND on Bottom Layer "Bottom Layer-GND" (solid, pour order 40): 1190.94,2913.39 4015.75,2913.39 4015.75,3435.04 1190.94,3435.04
P+ on Bottom Layer "Bottom Layer-P+" (solid, pour order 38): 5108.27,5008.27 ccw(c5008.27,5008.27) 5008.27,5108.27 1279.53,5108.27 ccw(c1279.53,5019.69) 1190.94,5019.69 1190.94,3503.94 1555.12,3503.94 1555.12,4921.26 2854.33,4921.26 4832.68,4921.26 4832.68,4822.83 5108.27,4822.83
no net on Bottom Layer "Bottom Layer-No Net 1" (solid, pour order 36): 1188.98,3503.94
GND on Bottom Layer "Bottom Layer-GND 1" (solid, remove dead copper, pour order 26): 4547.24,4734.25 4547.24,4862.2 4822.83,4862.2 4822.83,4793.31 5114.17,4793.31 5114.17,1285.04 cw(c5014.17,1285.04) 5014.17,1185.04 1285.04,1185.04 cw(c1285.04,1285.04) 1185.04,1285.04 1185.04,2952.76 1535.43,2952.76 1535.43,1377.95 4314.96,1377.95 4311.02,1781.5 3976.38,1781.5 3976.38,3435.04 4547.24,3435.04 4547.24,4488.19 4744.09,4488.19 4744.09,4734.25
NetBT4_2 on Bottom Layer "Bottom Layer-NetBT4_2" (solid, pour order 10): 1594.49,4881.89 1594.49,3494.09 4311.02,3494.09 4311.02,3710.63 2814.96,3710.63 2814.96,4881.89
NetBT6_2 on Bottom Layer "Bottom Layer-NetBT6_2" (solid, pour order 6): 2854.33,4881.89 2854.33,3740.16 4517.72,3740.16 4517.72,4177.17 4517.72,4881.89
NetBT5_2 on Bottom Layer "Bottom Layer-NetBT5_2" (solid, remove dead copper, pour order 24): 2204.72,2834.65 2204.72,1427.17 4281.5,1427.17 4281.5,1761.81 3937.01,1761.81 3937.01,2834.65
NetBT3_2 on Bottom Layer "Bottom Layer-NetBT3_2" (solid, pour order 20): 2165.35,2834.65 1574.8,2834.65 1574.8,1427.17 2165.35,1427.17 2165.35,2165.35
no net on Bottom Layer "Bottom Layer-No Net 2" (solid, pour order 4): 2830.71,4874.02
no net on Bottom Layer "Bottom Layer-No Net" (solid, pour order 0): 1602.36,1421.26
NetBT2_2 on Top Layer "Top Layer-NetBT2_2" (solid, pour order 44): 1594.49,3996.06 1594.49,3562.99 2834.65,3562.99 2834.65,3996.06
P+ on Top Layer "Top Layer-P+" (solid, pour order 42): 1190.94,3528.45 1190.94,2667.32 1564.96,2667.32 1564.96,2352.36 3937.01,2352.36 3937.01,2854.33 2824.8,2854.33 2824.8,3528.45
GND on Top Layer "Top Layer-GND" (solid, remove dead copper, pour order 34): 5114.17,1461.59 5114.17,1285.04 cw(c5014.18,1285.03) 5014.17,1185.04 1285.04,1185.04 cw(c1285.03,1285.03) 1185.04,1285.04 1185.04,2608.27 1535.43,2608.27 1535.43,1377.95 4314.96,1377.95 4314.96,1461.59
NetBT6_2 on Top Layer "Top Layer-NetBT6_2" (solid, remove dead copper, pour order 28): 2856.91,3966.54 2856.91,2893.7 3976.38,2893.7 3976.38,1811.02 4330.71,1811.02 4330.71,1496.06 5118.11,1496.06 5118.11,4448.82 4330.71,4448.82 4330.71,3966.54
no net on Top Layer "Top Layer-No Net" (solid, pour order 30): 2854.33,3740.16
NetBT1_2 on Top Layer "Top Layer-NetBT1_2" (solid, remove dead copper, pour order 22): 2204.72,2135.83 2204.72,1427.17 4281.5,1427.17 4281.5,1761.81 3937.01,1761.81 3937.01,2135.83
NetBT3_2 on Top Layer "Top Layer-NetBT3_2" (solid, pour order 18): 4291.34,2312.99 1574.8,2312.99 1574.8,1427.17 2165.35,1427.17 2165.35,2165.35 4291.34,2165.35
no net on Top Layer "Top Layer-No Net 1" (solid, pour order 16): 1594.49,1417.32
P+ on Top Layer "Top Layer-P+ 1" (solid, pour order 12): 5108.27,5008.27 ccw(c5008.27,5008.27) 5008.27,5108.27 1279.53,5108.27 ccw(c1279.53,5019.69) 1190.94,5019.69 1190.94,3503.94 1555.12,3503.94 1555.12,4921.26 2854.33,4921.26 2854.33,4173.23 4232.28,4173.23 4232.28,4773.62 4527.56,4773.62 4527.56,4872.05 4832.68,4872.05 4832.68,4822.83 5108.27,4822.83
CH+ on Top Layer "Top Layer-CH+" (solid, remove dead copper, pour order 8): 4419.29,4714.57 4419.29,4537.4 4714.57,4537.4 4714.57,4714.57
NetBT2_2 on Top Layer "Top Layer-NetBT2_2 1" (solid, remove dead copper, pour order 2): 1598.43,4854.33 1598.43,4881.89 2822.83,4881.89 2822.83,4145.67 4299.21,4145.67 4299.21,3984.25 1598.43,3984.25

## Silkscreen, mask and mechanical layers (free items; w line width, h text height)
Top Overlay:
  drawing of 606 lines, arcs and shapes, not listed
  text "+" at 1712.6,4911.42 h300
  text "-" at 2598.43,4911.42 h300
  text "+" at 3435.04,4911.42 h300
  text "24V+" at 1279.53,4862.2 h100 r90
  text "24V+" at 5078.74,4852.36 h100 r90
  text "6S 18650" at 4261.81,3779.53 h100
  text "24V CHARGE" at 4261.81,3690.94 h100
  text "BOARD" at 4261.81,3600.39 h100
  text "2022" at 4261.81,3513.78 h100
  text "ELIN DESIGN" at 4933.07,2539.37 h70 r90
  text "GND" at 1289.37,1299.21 h100 r90
  text "GND" at 5078.74,1289.37 h100 r90
  text "-" at 1732.28,1250 h300
  text "+" at 2578.74,1250 h300
  text "-" at 3474.41,1250 h300
Bottom Overlay:
  text "24V+" at 1279.53,5049.21 h100 r90
  text "24V+" at 5078.74,5039.37 h100 r90
  text "-" at 1732.28,4911.42 h300
  text "+" at 2588.58,4911.42 h300
  text "-" at 3474.41,4911.42 h300
  text "DESIGNED BY ELIN 2022" at 4114.17,2332.68 h100 r270
  text "GND" at 1289.37,1476.38 h100 r90
  text "GND" at 5078.74,1466.54 h100 r90
  text "-" at 2598.43,1259.84 h300
  text "+" at 1712.6,1250 h300
  text "+" at 3454.72,1250 h300
Mechanical 1:
  the board outline again, w10

## Dimensions
5000,1181.1 to 5000,5118.11 on Mechanical 1
1181.1,1299.21 to 5118.11,1299.21 on Mechanical 1